# EAGLE board nutzen_06 (EAGLE 9.6.2), part 1 of 3
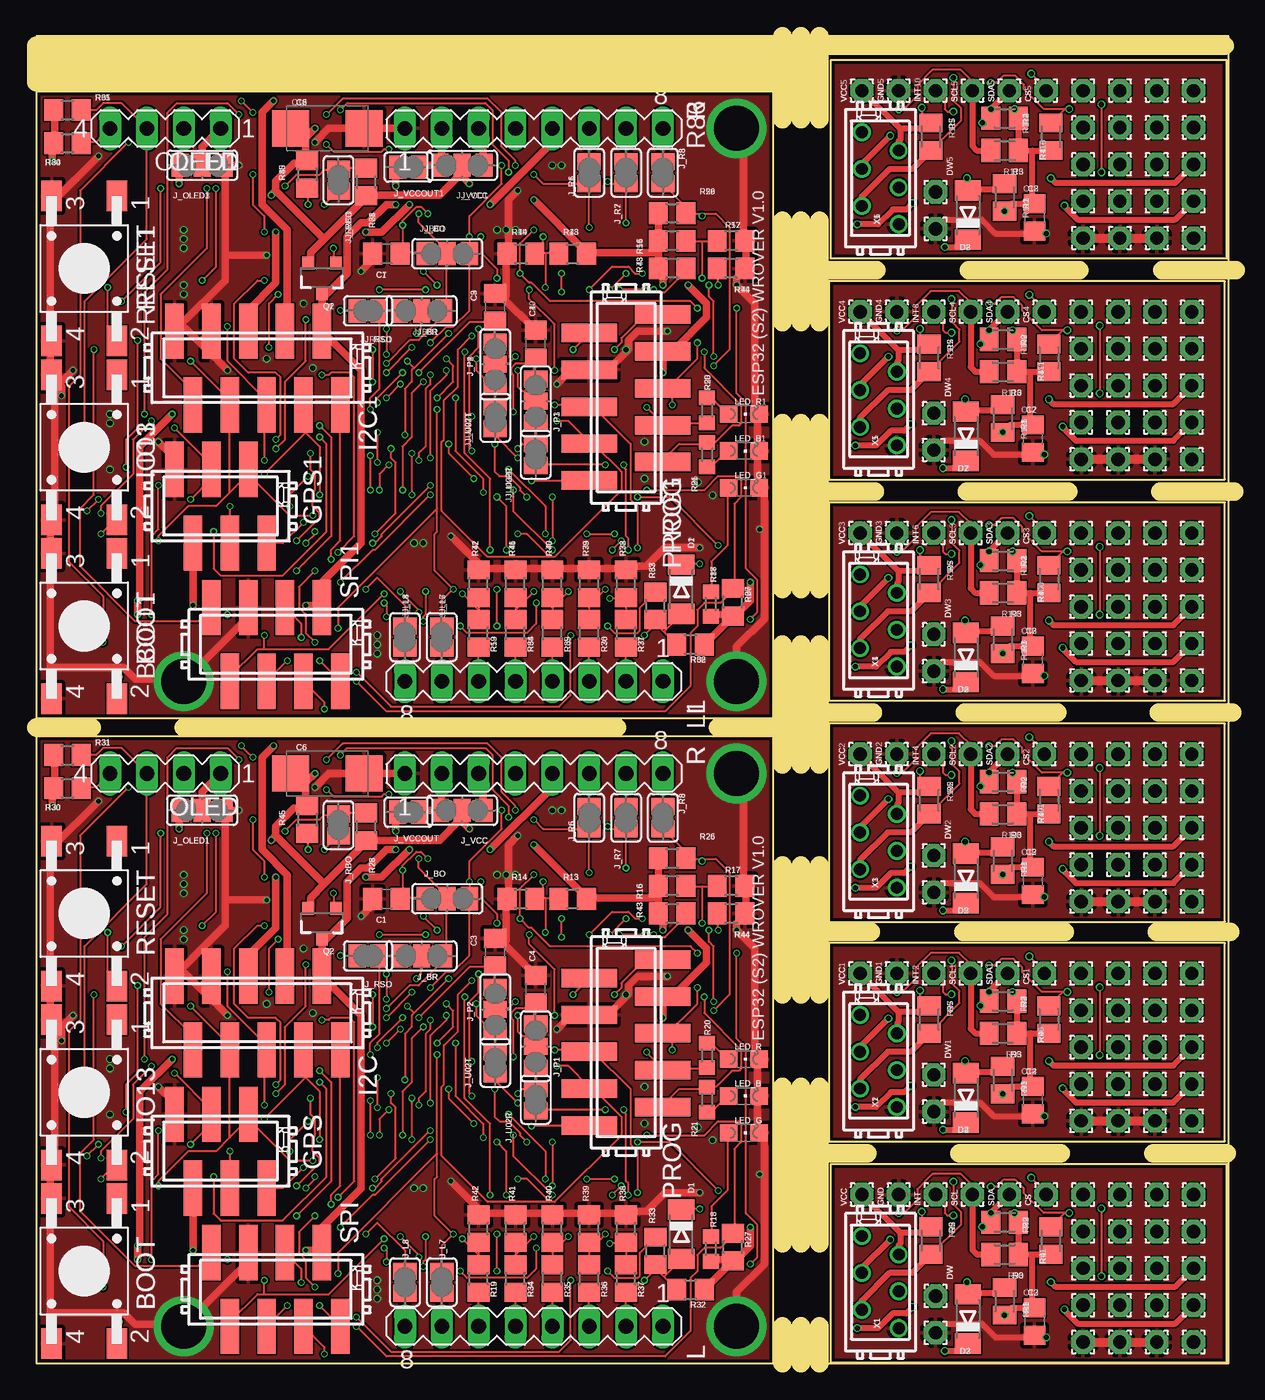
[diagram p0: board, top side]
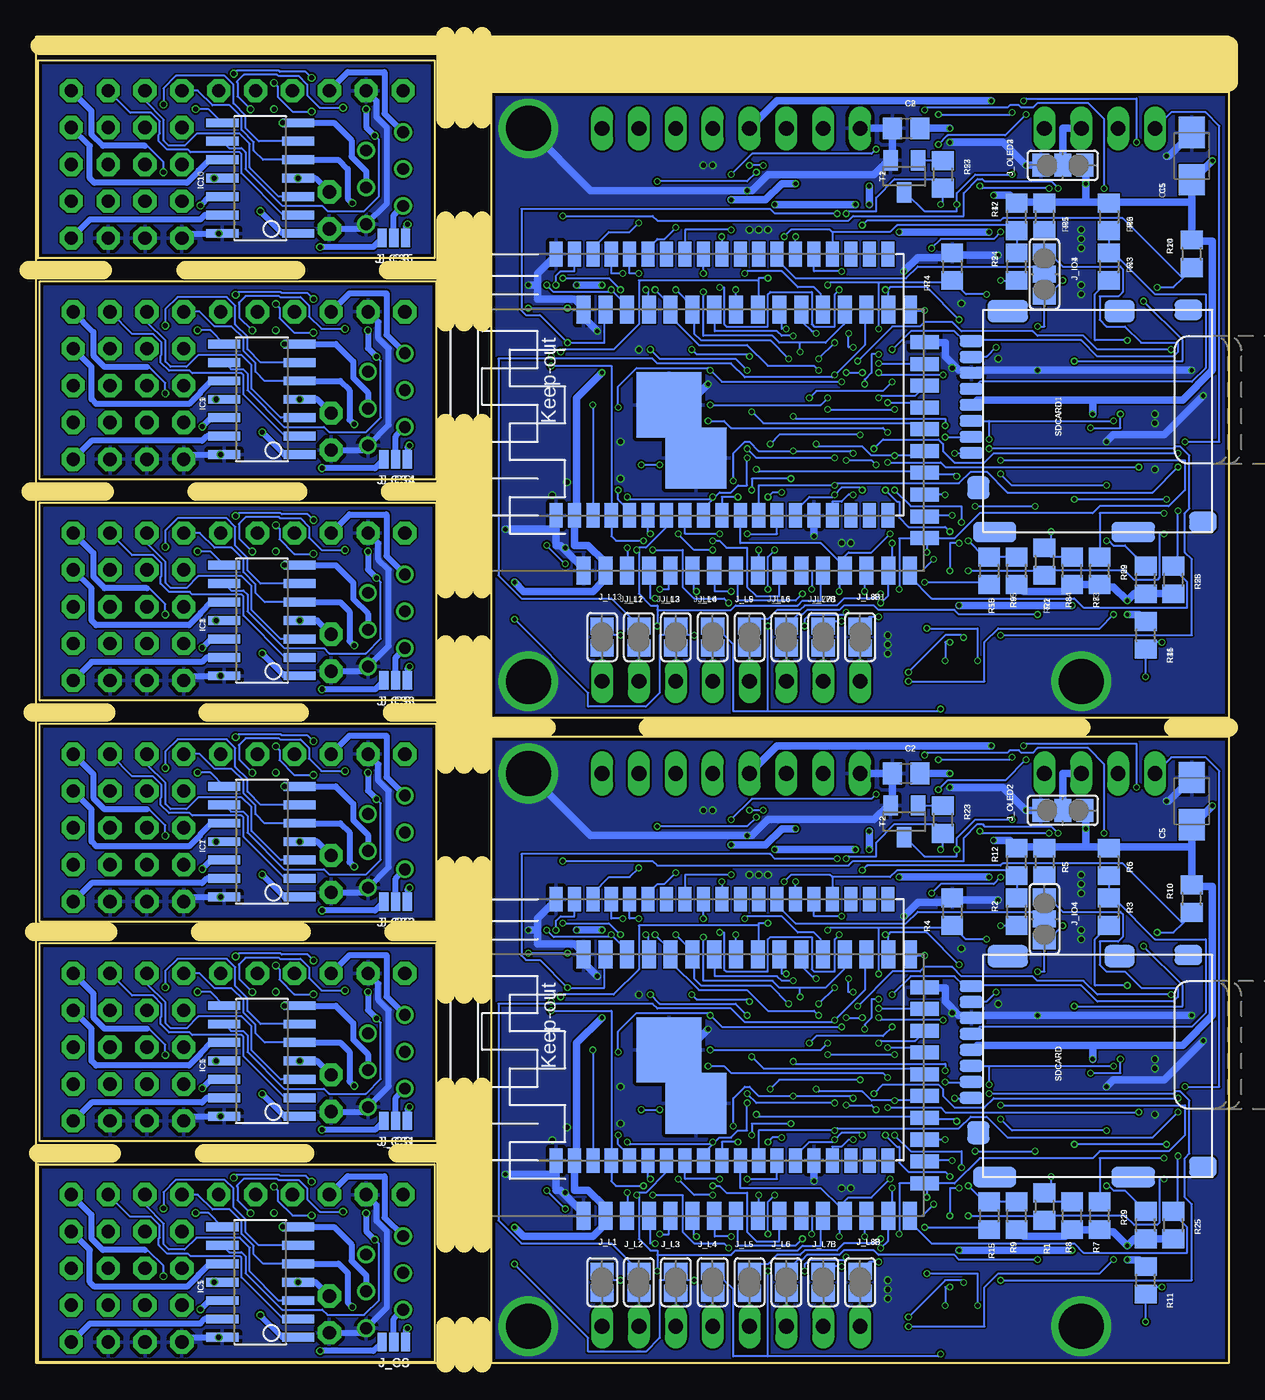
[diagram p1: board, bottom side, seen from below]

Size 82.17 x 91.44 mm. Coordinates in mm from the lower left corner, seen from the top.
Outline: 50.8,0 50.8,43.18 0,43.18
Outline: 0,43.18 0,0 50.8,0
Outline: 50.8,0 82.17,0 82.17,91.44 0,91.44 0,43.18
Outline: 50.8,44.45 50.8,87.63 0,87.63 0,44.45 50.8,44.45
Outline: 82.04,0.06 82.04,13.72 54.74,13.72 54.74,0.06 82.04,0.06
Outline: 81.92,15.3 81.92,28.96 54.61,28.96 54.61,15.3 81.92,15.3
Outline: 81.92,30.42 81.92,44.07 54.61,44.07 54.61,30.42 81.92,30.42
Outline: 81.92,45.66 81.92,59.31 54.61,59.31 54.61,45.66 81.92,45.66
Outline: 81.92,60.9 81.92,74.55 54.61,74.55 54.61,60.9 81.92,60.9
Outline: 82.04,76.14 82.04,89.79 54.74,89.79 54.74,76.14 82.04,76.14
Copper layers (1*16): Top 0.035559375mm / dielectric 1.6mm / Bottom 0.035559375mm
Design rules "jlcpcb2layer": minimum track width 5mil, minimum drill 12mil, track to track 5mil, track to pad 5mil, pad to pad 5mil, via to via 5mil, smd to smd 5mil, copper to edge 8mil, drill to drill 6mil, minimum pad ring 5mil, minimum via ring 3mil, stop-mask expansion 2.5mil, vias tented up to drill 0mil, thermal gap 10mil
Net classes: 1 gnd: width 0.508 mm, drill 0.254 mm; 2 power: width 0.508 mm, drill 0.254 mm
Milling: 46 lines

## Footprints (pad centres in the part's own frame; a part is rotated, then mirrored left to right if it is on the bottom)
TASTER-9314_SMD = smd 2.1 x 1.4: 1 -5,2.25; 2 5,2.25; 3 -5,-2.25; 4 5,-2.25
C0805 = smd 1.3 x 1.5: 1 -0.95,0; 2 0.95,0
B/3528-21W = smd 2.15 x 1.8: + 1.625,0; - -1.625,0
C/6032-28R = smd 2.55 x 2.5: + 2.525,0; - -2.525,0
1,6/0,9 = drill 0.914 pad 1.6 octagon: 1 0,0
MINIMELF = smd 1.4 x 1.8: A 1.7,0; C -1.7,0
MICROMATCH-6SMD = smd 1.27 x 3.81: 1 3.175,-2.54; 2 1.905,2.54; 3 0.635,-2.54; 4 -0.635,2.54; 5 -1.905,-2.54; 6 -3.175,2.54
MICROMATCH-10SMD = smd 1.27 x 3.81: 1 5.715,-2.54; 2 4.445,2.54; 3 3.175,-2.54; 4 1.905,2.54; 5 0.635,-2.54; 6 -0.635,2.54; 7 -1.905,-2.54; 8 -3.175,2.54; 9 -4.445,-2.54; 10 -5.715,2.54
ESP32-S2-WROVER = smd 1.93 x 0.965: 1 0,0; 2 0,-1.5; 3 0,-3; 4 0,-4.5; 5 0,-6; 6 0,-7.5; 7 0,-9; 8 0,-10.5; 9 0,-12; 10 0,-13.5; 11 0,-15; 12 0,-16.5; 13 0,-18; 14 0,-19.5; 15 0,-21; 16 0,-22.5; 27 18,-22.5; 28 18,-21; 29 18,-19.5; 30 18,-18; 31 18,-16.5; 32 18,-15; 33 18,-13.5; 34 18,-12; 35 18,-10.5; 36 18,-9; 37 18,-7.5; 38 18,-6; 39 18,-4.5; 40 18,-3; 41 18,-1.5; 42 18,0 | smd 0.965 x 1.93: 17 2.25,-23.5; 18 3.75,-23.5; 19 5.25,-23.5; 20 6.75,-23.5; 21 8.25,-23.5; 22 9.75,-23.5; 23 11.25,-23.5; 24 12.75,-23.5; 25 14.25,-23.5; 26 15.75,-23.5 | smd 4.2 x 4.2: 43 7.75,-7.75
ESP32-WROVER = smd 1.7 x 0.9: CLK 18,1.27; CMD 0,1.27; EN 0,21.59; GND 0,24.13; GND3 18,24.13; GND_2 0,6.35; IO0 18,7.62; IO2 18,6.35; IO4 18,8.89; IO5 18,12.7; IO12 0,7.62; IO13 0,5.08; IO14 0,8.89; IO15 18,5.08; IO18 18,13.97; IO19 18,15.24; IO21 18,17.78; IO22 18,21.59; IO23 18,22.86; IO25 0,12.7; IO26 0,11.43; IO27 0,10.16; IO32 0,15.24; IO33 0,13.97; IO34 0,17.78; IO35 0,16.51; NC0 18,16.51; NC1 18,10.16; NC2 18,11.43; RXD0 18,19.05; SD0 18,2.54; SD1 18,3.81; SD2 0,3.81; SD3 0,2.54; SENSOR_VN 0,19.05; SENSOR_VP 0,20.32; TXD0 18,20.32; VDD33 0,22.86 | smd 4.5 x 4.5: GND2 7.62,16.34
SOIC14 = smd 0.61 x 2.21: 1 -3.81,-2.603; 2 -2.54,-2.603; 3 -1.27,-2.603; 4 0,-2.603; 5 1.27,-2.603; 6 2.54,-2.603; 7 3.81,-2.603; 8 3.81,2.603; 9 2.54,2.603; 10 1.27,2.603; 11 0,2.603; 12 -1.27,2.603; 13 -2.54,2.603; 14 -3.81,2.603
SJ_2 = smd 1.168 x 1.6: 1 -1.524,0; 2 0,0; 3 1.524,0
SMT-JUMPER_3_1-NC_PASTE_NO-SILK = smd 0.635 x 1.27: 1 -0.813,0; 2 0,0; 3 0.813,0
SJ = smd 1.168 x 1.6: 1 -0.762,0; 2 0.762,0
MA08-1 = drill 1.016 long: 1 -8.89,0; 2 -6.35,0; 3 -3.81,0; 4 -1.27,0; 5 1.27,0; 6 3.81,0; 7 6.35,0; 8 8.89,0
CHIPLED_0805 = smd 1.2 x 1.2: A 0,-1.05; C 0,1.05
MA04-1 = drill 1.016 long: 1 -3.81,0; 2 -1.27,0; 3 1.27,0; 4 3.81,0
SOT23-3 = smd 0.8 x 0.9: 1 -0.95,-1; 2 0.95,-1; 3 0,1.1
R0805 = smd 1.3 x 1.5: 1 -0.95,0; 2 0.95,0
R0603 = smd 1 x 1.1: 1 -0.85,0; 2 0.85,0
M0805 = smd 1.3 x 1.6: 1 -0.95,0; 2 0.95,0
MICRO_SD_CONNECTOR = smd 0.8 x 1.6: 1 -2.03,8.2; 2 -0.93,8.2; 3 0.17,8.2; 4 1.27,8.2; 5 2.37,8.2; 6 3.47,8.2; 7 4.57,8.2; 8 5.67,8.2 | smd 1.55 x 2.8: 9 7.735,5.7 | smd 1.55 x 2.1: 10 7.735,-2 | smd 1.4 x 1.9: 11 7.81,-6.75; 12 -6.79,-7.75 | smd 1.4 x 3: 13 -7.49,-2.95; 14 -7.49,6.6 | smd 1.6 x 1.55: 15 -4.43,7.725
MICROMATCH-8-SMD = smd 1.27 x 3.81: 1 4.445,-2.54; 2 3.175,2.54; 3 1.905,-2.54; 4 0.635,2.54; 5 -0.635,-2.54; 6 -1.905,2.54; 7 -3.175,-2.54; 8 -4.445,2.54
SOT23-BEC = smd 1 x 1.4: B -0.95,-1.1; C 0,1.1; E 0.95,-1.1
MICROMATCH-6 = drill 0.813: 1 3.175,1.27; 2 1.905,-1.27; 3 0.635,1.27; 4 -0.635,-1.27; 5 -1.905,1.27; 6 -3.175,-1.27

## Placement (x,y rotation side)
BOOT  [TASTER-9314_SMD]  3.3,6.35 270 top
BOOT1  [TASTER-9314_SMD]  3.3,50.8 270 top
C1  0.1  [C0805]  24.13,32 180 top
C2  0.1  [C0805]  22.23,40.64 180 bottom
C3  22p  [C0805]  31.62,28.32 90 top
C4  22p  [C0805]  34.42,25.78 90 top
C5  10u  [B/3528-21W]  2.54,38.73 270 bottom
C6  [C/6032-28R]  20.07,40.64 180 top
C7  0.1  [C0805]  24.13,76.45 180 top
C8  0.1  [C0805]  22.23,85.09 180 bottom
C9  22p  [C0805]  31.62,72.77 90 top
C10  22p  [C0805]  34.42,70.23 90 top
C11  10u  [B/3528-21W]  2.54,83.19 270 bottom
C12  [C/6032-28R]  20.07,85.09 180 top
C13  100n  [C0805]  68.8,2.88 270 top
C14  100n  [C0805]  68.67,18.12 270 top
C15  100n  [C0805]  68.67,33.24 270 top
C16  100n  [C0805]  68.67,48.48 270 top
C17  100n  [C0805]  68.67,63.72 270 top
C18  100n  [C0805]  68.8,78.96 270 top
CS  [1,6/0,9]  69.6,11.62 90 top
CS1  [1,6/0,9]  69.47,26.86 90 top
CS2  [1,6/0,9]  69.47,41.97 90 top
CS3  [1,6/0,9]  69.47,57.21 90 top
CS4  [1,6/0,9]  69.47,72.45 90 top
CS5  [1,6/0,9]  69.6,87.69 90 top
D1  4148  [MINIMELF]  44.45,8.89 270 top
D2  4148  [MINIMELF]  44.45,53.34 270 top
D3  [MINIMELF]  64.2,3.05 90 top
D4  [MINIMELF]  64.07,18.29 90 top
D5  [MINIMELF]  64.07,33.4 90 top
D6  [MINIMELF]  64.07,48.64 90 top
D7  [MINIMELF]  64.07,63.88 90 top
D8  [MINIMELF]  64.2,79.12 90 top
DW  [1,6/0,9]  61.98,4.64 90 top
DW1  [1,6/0,9]  61.85,19.88 90 top
DW2  [1,6/0,9]  61.85,34.99 90 top
DW3  [1,6/0,9]  61.85,50.23 90 top
DW4  [1,6/0,9]  61.85,65.47 90 top
DW5  [1,6/0,9]  61.98,80.71 90 top
GND  [1,6/0,9]  59.44,11.62 90 top
GND1  [1,6/0,9]  59.31,26.86 90 top
GND2  [1,6/0,9]  59.31,41.97 90 top
GND3  [1,6/0,9]  59.31,57.21 90 top
GND4  [1,6/0,9]  59.31,72.45 90 top
GND5  [1,6/0,9]  59.44,87.69 90 top
GND_  [1,6/0,9]  61.98,2.1 90 top
GND_1  [1,6/0,9]  61.85,17.34 90 top
GND_2  [1,6/0,9]  61.85,32.45 90 top
GND_3  [1,6/0,9]  61.85,47.69 90 top
GND_4  [1,6/0,9]  61.85,62.93 90 top
GND_5  [1,6/0,9]  61.98,78.17 90 top
GPS  GPS  [MICROMATCH-6SMD]  12.7,14.61 0 top
GPS1  GPS  [MICROMATCH-6SMD]  12.7,59.05 0 top
I2C  I2CBUS  [MICROMATCH-10SMD]  15.24,24.13 0 top
I2C1  I2CBUS  [MICROMATCH-10SMD]  15.24,68.58 0 top
IC1  ESP32-S2_WROVER  [ESP32-S2-WROVER]  44.45,10.16 90 bottom
IC2  ESP32-WROVER  [ESP32-WROVER]  22.23,13.97 90 bottom
IC3  ESP32-S2_WROVER  [ESP32-S2-WROVER]  44.45,54.61 90 bottom
IC4  ESP32-WROVER  [ESP32-WROVER]  22.23,58.42 90 bottom
IC5  TINY84 or TINY841  [SOIC14]  66.74,5.59 90 bottom
IC6  TINY84 or TINY841  [SOIC14]  66.61,20.83 90 bottom
IC7  TINY84 or TINY841  [SOIC14]  66.61,35.94 90 bottom
IC8  TINY84 or TINY841  [SOIC14]  66.61,51.18 90 bottom
IC9  TINY84 or TINY841  [SOIC14]  66.61,66.42 90 bottom
IC10  TINY84 or TINY841  [SOIC14]  66.74,81.66 90 bottom
INT  [1,6/0,9]  61.98,11.62 90 top
INT0  [1,6/0,9]  72.14,11.62 90 top
INT1  [1,6/0,9]  72.01,26.86 90 top
INT2  [1,6/0,9]  61.85,26.86 90 top
INT3  [1,6/0,9]  72.01,41.97 90 top
INT4  [1,6/0,9]  61.85,41.97 90 top
INT5  [1,6/0,9]  72.01,57.21 90 top
INT6  [1,6/0,9]  61.85,57.21 90 top
INT7  [1,6/0,9]  72.01,72.45 90 top
INT8  [1,6/0,9]  61.85,72.45 90 top
INT9  [1,6/0,9]  72.14,87.69 90 top
INT10  [1,6/0,9]  61.98,87.69 90 top
IO1  [TASTER-9314_SMD]  3.3,63.12 270 top
IO13  [TASTER-9314_SMD]  3.3,18.67 270 top
J_BO  [SJ_2]  28.32,32 180 top
J_BO1  [SJ_2]  28.32,76.45 180 top
J_BR  [SJ_2]  26.54,28.07 180 top
J_BR1  [SJ_2]  26.54,72.52 180 top
J_CS  [SMT-JUMPER_3_1-NC_PASTE_NO-SILK]  57.53,1.46 180 bottom
J_CS1  [SMT-JUMPER_3_1-NC_PASTE_NO-SILK]  57.4,16.7 180 bottom
J_CS2  [SMT-JUMPER_3_1-NC_PASTE_NO-SILK]  57.4,31.81 180 bottom
J_CS3  [SMT-JUMPER_3_1-NC_PASTE_NO-SILK]  57.4,47.05 180 bottom
J_CS4  [SMT-JUMPER_3_1-NC_PASTE_NO-SILK]  57.4,62.29 180 bottom
J_CS5  [SMT-JUMPER_3_1-NC_PASTE_NO-SILK]  57.53,77.53 180 bottom
J_IO1  [SJ_2]  12.7,75.06 270 bottom
J_IO4  [SJ_2]  12.7,30.61 270 bottom
J_L1  [SJ]  43.18,5.59 270 bottom
J_L2  [SJ]  40.64,5.59 270 bottom
J_L3  [SJ]  38.1,5.59 270 bottom
J_L4  [SJ]  35.56,5.59 270 bottom
J_L5  [SJ]  33.02,5.59 270 bottom
J_L6  [SJ]  30.48,5.59 270 bottom
J_L7  [SJ]  27.94,5.59 270 top
J_L7B  [SJ]  27.94,5.59 270 bottom
J_L7B1  [SJ]  27.94,50.04 270 bottom
J_L8  [SJ]  25.4,5.59 270 top
J_L8B  [SJ]  25.4,5.59 270 bottom
J_L8B1  [SJ]  25.4,50.04 270 bottom
J_L9  [SJ]  33.02,50.04 270 bottom
J_L10  [SJ]  35.56,50.04 270 bottom
J_L11  [SJ]  40.64,50.04 270 bottom
J_L12  [SJ]  38.1,50.04 270 bottom
J_L13  [SJ]  43.18,50.04 270 bottom
J_L14  [SJ]  25.4,50.04 270 top
J_L15  [SJ]  27.94,50.04 270 top
J_L16  [SJ]  30.48,50.04 270 bottom
J_OLED1  [SJ_2]  11.43,38.1 180 top
J_OLED2  [SJ_2]  11.43,38.1 0 bottom
J_OLED3  [SJ_2]  11.43,82.55 180 top
J_OLED4  [SJ_2]  11.43,82.55 0 bottom
J_P1  [SJ_2]  34.42,21.84 270 top
J_P2  [SJ_2]  31.62,24.38 270 top
J_P3  [SJ_2]  34.42,66.29 270 top
J_P4  [SJ_2]  31.62,68.83 270 top
J_R1  [SJ]  38.1,82.04 270 top
J_R2  [SJ]  40.64,82.04 270 top
J_R3  [SJ]  43.18,82.04 270 top
J_R6  [SJ]  38.1,37.59 270 top
J_R7  [SJ]  40.64,37.59 270 top
J_R8  [SJ]  43.18,37.59 270 top
J_RBO  [SJ]  20.83,37.08 270 top
J_RBO1  [SJ]  20.83,81.53 270 top
J_RSO  [SJ]  22.86,28.07 180 top
J_RSO1  [SJ]  22.86,72.52 180 top
J_U02R  [SJ]  34.42,18.16 270 top
J_U02R1  [SJ]  34.42,62.61 270 top
J_U02T  [SJ]  31.62,20.7 270 top
J_U02T1  [SJ]  31.62,65.15 270 top
J_VCC  [SJ_2]  29.34,38.1 180 top
J_VCC1  [SJ_2]  29.34,82.55 180 top
J_VCCOUT  [SJ]  25.65,37.97 0 top
J_VCCOUT1  [SJ]  25.65,82.42 0 top
L  [MA08-1]  34.29,2.54 180 top
L1  [MA08-1]  34.29,46.99 180 top
LED_B  G  [CHIPLED_0805]  48.77,18.41 270 top
LED_B1  G  [CHIPLED_0805]  48.77,62.87 270 top
LED_G  G  [CHIPLED_0805]  48.77,15.88 270 top
LED_G1  G  [CHIPLED_0805]  48.77,60.33 270 top
LED_R  R  [CHIPLED_0805]  48.77,20.95 270 top
LED_R1  R  [CHIPLED_0805]  48.77,65.41 270 top
OLED  [MA04-1]  8.89,40.64 180 top
OLED1  [MA04-1]  8.89,85.09 180 top
PA0  [1,6/0,9]  79.76,1.46 90 top
PA1  [1,6/0,9]  79.76,4 90 top
PA2  [1,6/0,9]  79.76,6.54 90 top
PA3  [1,6/0,9]  79.76,9.08 90 top
PA4  [1,6/0,9]  79.63,16.7 90 top
PA5  [1,6/0,9]  79.63,19.24 90 top
PA6  [1,6/0,9]  79.63,21.78 90 top
PA7  [1,6/0,9]  79.76,11.62 90 top
PA8  [1,6/0,9]  79.63,24.32 90 top
PA9  [1,6/0,9]  79.63,26.86 90 top
PA10  [1,6/0,9]  79.63,31.81 90 top
PA11  [1,6/0,9]  79.63,34.35 90 top
PA12  [1,6/0,9]  79.63,36.89 90 top
PA13  [1,6/0,9]  79.63,39.43 90 top
PA14  [1,6/0,9]  79.63,41.97 90 top
PA15  [1,6/0,9]  79.63,47.05 90 top
PA16  [1,6/0,9]  79.63,49.59 90 top
PA17  [1,6/0,9]  79.63,52.13 90 top
PA18  [1,6/0,9]  79.63,54.67 90 top
PA19  [1,6/0,9]  79.63,57.21 90 top
PA20  [1,6/0,9]  79.63,62.29 90 top
PA21  [1,6/0,9]  79.63,64.83 90 top
PA22  [1,6/0,9]  79.63,67.37 90 top
PA23  [1,6/0,9]  79.63,69.91 90 top
PA24  [1,6/0,9]  79.63,72.45 90 top
PA25  [1,6/0,9]  79.76,77.53 90 top
PA26  [1,6/0,9]  79.76,80.07 90 top
PA27  [1,6/0,9]  79.76,82.61 90 top
PA28  [1,6/0,9]  79.76,85.15 90 top
PA29  [1,6/0,9]  79.76,87.69 90 top
PAD1  [1,6/0,9]  74.55,24.32 90 top
PAD2  [1,6/0,9]  74.55,21.78 90 top
PAD3  [1,6/0,9]  77.09,21.78 90 top
PAD4  [1,6/0,9]  72.01,21.78 90 top
PAD5  [1,6/0,9]  74.55,19.24 90 top
PAD6  [1,6/0,9]  77.09,19.24 90 top
PAD7  [1,6/0,9]  72.01,24.32 90 top
PAD8  [1,6/0,9]  77.09,24.32 90 top
PAD9  [1,6/0,9]  72.01,19.24 90 top
PAD10  [1,6/0,9]  72.01,16.7 90 top
PAD11  [1,6/0,9]  74.55,16.7 90 top
PAD12  [1,6/0,9]  77.09,16.7 90 top
PAD13  [1,6/0,9]  74.55,39.43 90 top
PAD14  [1,6/0,9]  74.55,36.89 90 top
PAD15  [1,6/0,9]  77.09,36.89 90 top
PAD16  [1,6/0,9]  72.01,36.89 90 top
PAD17  [1,6/0,9]  74.55,34.35 90 top
PAD18  [1,6/0,9]  77.09,34.35 90 top
PAD19  [1,6/0,9]  72.01,39.43 90 top
PAD20  [1,6/0,9]  77.09,39.43 90 top
PAD21  [1,6/0,9]  72.01,34.35 90 top
PAD22  [1,6/0,9]  72.01,31.81 90 top
PAD23  [1,6/0,9]  74.55,31.81 90 top
PAD24  [1,6/0,9]  77.09,31.81 90 top
PAD25  [1,6/0,9]  74.55,54.67 90 top
PAD26  [1,6/0,9]  74.55,52.13 90 top
PAD27  [1,6/0,9]  77.09,52.13 90 top
PAD28  [1,6/0,9]  72.01,52.13 90 top
PAD29  [1,6/0,9]  74.55,49.59 90 top
PAD30  [1,6/0,9]  77.09,49.59 90 top
PAD31  [1,6/0,9]  72.01,54.67 90 top
PAD32  [1,6/0,9]  77.09,54.67 90 top
PAD33  [1,6/0,9]  72.01,49.59 90 top
PAD34  [1,6/0,9]  72.01,47.05 90 top
PAD35  [1,6/0,9]  74.55,47.05 90 top
PAD36  [1,6/0,9]  77.09,47.05 90 top
PAD37  [1,6/0,9]  74.55,69.91 90 top
PAD38  [1,6/0,9]  74.55,67.37 90 top
PAD39  [1,6/0,9]  77.09,67.37 90 top
PAD40  [1,6/0,9]  72.01,67.37 90 top
PAD41  [1,6/0,9]  74.55,64.83 90 top
PAD42  [1,6/0,9]  77.09,64.83 90 top
PAD43  [1,6/0,9]  72.01,69.91 90 top
PAD44  [1,6/0,9]  77.09,69.91 90 top
PAD45  [1,6/0,9]  72.01,64.83 90 top
PAD46  [1,6/0,9]  72.01,62.29 90 top
PAD47  [1,6/0,9]  74.55,62.29 90 top
PAD48  [1,6/0,9]  77.09,62.29 90 top
PAD49  [1,6/0,9]  74.68,85.15 90 top
PAD50  [1,6/0,9]  74.68,82.61 90 top
PAD51  [1,6/0,9]  77.22,82.61 90 top
PAD52  [1,6/0,9]  72.14,82.61 90 top
PAD53  [1,6/0,9]  74.68,80.07 90 top
PAD54  [1,6/0,9]  77.22,80.07 90 top
PAD55  [1,6/0,9]  72.14,85.15 90 top
PAD56  [1,6/0,9]  77.22,85.15 90 top
PAD57  [1,6/0,9]  72.14,80.07 90 top
PAD58  [1,6/0,9]  72.14,77.53 90 top
PAD59  [1,6/0,9]  74.68,77.53 90 top
PAD60  [1,6/0,9]  77.22,77.53 90 top
PAD89  [1,6/0,9]  74.68,9.08 90 top
PAD90  [1,6/0,9]  74.68,6.54 90 top
PAD91  [1,6/0,9]  77.22,6.54 90 top
PAD94  [1,6/0,9]  72.14,6.54 90 top
PAD95  [1,6/0,9]  74.68,4 90 top
PAD96  [1,6/0,9]  77.22,4 90 top
PAD97  [1,6/0,9]  72.14,9.08 90 top
PAD98  [1,6/0,9]  77.22,9.08 90 top
PAD99  [1,6/0,9]  72.14,4 90 top
PAD100  [1,6/0,9]  72.14,1.46 90 top
PAD101  [1,6/0,9]  74.68,1.46 90 top
PAD102  [1,6/0,9]  77.22,1.46 90 top
PB0  [1,6/0,9]  77.22,11.62 90 top
PB1  [1,6/0,9]  74.68,11.62 90 top
PB2  [1,6/0,9]  77.09,26.86 90 top
PB3  [1,6/0,9]  74.55,26.86 90 top
PB4  [1,6/0,9]  77.09,41.97 90 top
PB5  [1,6/0,9]  74.55,41.97 90 top
PB6  [1,6/0,9]  77.09,57.21 90 top
PB7  [1,6/0,9]  74.55,57.21 90 top
PB8  [1,6/0,9]  77.09,72.45 90 top
PB9  [1,6/0,9]  74.55,72.45 90 top
PB10  [1,6/0,9]  77.22,87.69 90 top
PB11  [1,6/0,9]  74.68,87.69 90 top
PROG  I2CBUS  [MICROMATCH-10SMD]  40.64,22.1 90 top
PROG1  I2CBUS  [MICROMATCH-10SMD]  40.64,66.55 90 top
Q1  IRLML2244  [SOT23-3]  19.68,74.8 180 top
Q2  IRLML2244  [SOT23-3]  19.68,30.35 180 top
R  [MA08-1]  34.29,40.64 0 top
R1  [R0805]  12.7,10.79 270 bottom
R2  [R0805]  14.61,31.11 90 bottom
R3  [R0805]  8.26,31.11 270 bottom
R4  [R0805]  19.05,31.11 270 bottom
R5  [R0805]  12.7,34.54 270 bottom
R6  [R0805]  8.26,34.54 270 bottom
R7  [R0805]  8.89,10.16 90 bottom
R8  [R0805]  10.79,10.16 90 bottom
R9  [R0805]  14.61,10.16 90 bottom
R10  10k  [R0805]  2.54,32 90 bottom
R11  10k  [R0805]  5.71,5.71 90 bottom
R12  10k  [R0805]  14.61,34.54 90 bottom
R13  10k  [R0805]  36.96,32 0 top
R14  10k  [R0805]  33.4,32 0 top
R15  [R0805]  16.51,10.16 270 bottom
R16  10k  [R0805]  43.81,32.89 180 top
R17  10k  [R0805]  47.88,32.89 180 top
R18  [R0603]  46.48,7.87 270 top
R19  [R0805]  30.48,5.84 90 top
R20  [R0603]  46.23,21.21 270 top
R21  [R0603]  46.23,18.16 90 top
R22  [R0805]  12.7,55.24 270 bottom
R23  10k  [R0805]  19.68,37.47 90 bottom
R24  10k  [R0805]  2.54,76.45 90 bottom
R25  [R0805]  3.81,9.53 90 bottom
R26  [R0805]  43.81,34.8 0 top
R27  [R0805]  48.01,8 90 top
R28  [R0805]  22.73,36.96 90 top
R29  [R0805]  5.71,9.53 90 bottom
R30  [R0805]  2.16,39.62 0 top
R31  [R0805]  2.16,41.91 0 top
R32  [R0805]  45.09,5.08 0 top
R33  [R0805]  42.67,7.75 90 top
R34  [R0805]  33.02,5.84 90 top
R35  [R0805]  35.56,5.84 90 top
R36  [R0805]  38.1,5.84 90 top
R37  [R0805]  40.64,5.84 90 top
R38  [R0805]  40.64,9.27 90 top
R39  [R0805]  38.1,9.27 90 top
R40  [R0805]  35.56,9.27 90 top
R41  [R0805]  33.02,9.27 90 top
R42  [R0805]  30.48,9.27 90 top
R43  10k  [R0805]  43.81,30.99 180 top
R44  10k  [R0805]  47.88,30.99 180 top
R45  10k  [R0805]  18.67,37.47 270 top
R46  10k  [R0805]  5.71,50.16 90 bottom
R47  10k  [R0805]  14.61,78.99 90 bottom
R48  10k  [R0805]  36.96,76.45 0 top
R49  10k  [R0805]  33.4,76.45 0 top
R50  [R0805]  16.51,54.61 270 bottom
R51  10k  [R0805]  43.81,77.34 180 top
R52  10k  [R0805]  47.88,77.34 180 top
R53  [R0805]  30.48,50.29 90 top
R54  [R0805]  14.61,75.56 90 bottom
R55  [R0603]  46.23,65.66 270 top
R56  [R0603]  46.23,62.61 90 top
R57  10k  [R0805]  19.68,81.92 90 bottom
R58  [R0805]  3.81,53.98 90 bottom
R59  [R0805]  43.81,79.25 0 top
R60  [R0805]  48.01,52.45 90 top
R61  [R0805]  22.73,81.41 90 top
R62  [R0805]  5.71,53.98 90 bottom
R63  [R0805]  8.26,75.56 270 bottom
R64  [R0805]  2.16,84.07 0 top
R65  [R0805]  2.16,86.36 0 top
R66  [R0805]  45.09,49.53 0 top
R67  [R0805]  42.67,52.2 90 top
R68  [R0805]  33.02,50.29 90 top
R69  [R0805]  35.56,50.29 90 top
R70  [R0805]  38.1,50.29 90 top
R71  [R0805]  40.64,50.29 90 top
R72  [R0805]  40.64,53.72 90 top
R73  [R0805]  38.1,53.72 90 top
R74  [R0805]  19.05,75.56 270 bottom
R75  [R0805]  35.56,53.72 90 top
R76  [R0805]  33.02,53.72 90 top
R77  [R0805]  30.48,53.72 90 top
R78  10k  [R0805]  43.81,75.44 180 top
R79  10k  [R0805]  47.88,75.44 180 top
R80  10k  [R0805]  18.67,81.92 270 top
R81  [R0805]  12.7,78.99 270 bottom
R82  [R0805]  8.26,78.99 270 bottom
R83  [R0805]  8.89,54.61 90 bottom
R84  [R0805]  10.79,54.61 90 bottom
R85  [R0805]  14.61,54.61 90 bottom
R86  [MA08-1]  34.29,85.09 0 top
R87  [R0603]  46.48,52.32 270 top
R88  10k  [M0805]  66.73,4.27 90 top
R89  10k  [M0805]  66.74,9.72 180 top
R90  10k  [M0805]  66.74,7.49 180 top
R91  10k  [M0805]  69.91,8.45 90 top
R92  10k  [M0805]  61.66,8.45 270 top
R93  10k  [M0805]  66.6,19.51 90 top
R94  10k  [M0805]  66.61,24.96 180 top
R95  10k  [M0805]  66.61,22.73 180 top
R96  10k  [M0805]  69.79,23.69 90 top
R97  10k  [M0805]  61.53,23.69 270 top
R98  10k  [M0805]  66.6,34.62 90 top
R99  10k  [M0805]  66.61,40.07 180 top
R100  10k  [M0805]  66.61,37.85 180 top
R101  10k  [M0805]  69.79,38.8 90 top
R102  10k  [M0805]  61.53,38.8 270 top
R103  10k  [M0805]  66.6,49.86 90 top
R104  10k  [M0805]  66.61,55.31 180 top
R105  10k  [M0805]  66.61,53.09 180 top
R106  10k  [M0805]  69.79,54.04 90 top
R107  10k  [M0805]  61.53,54.04 270 top
R108  10k  [M0805]  66.6,65.1 90 top
R109  10k  [M0805]  66.61,70.55 180 top
R110  10k  [M0805]  66.61,68.33 180 top
R111  10k  [M0805]  69.79,69.28 90 top
R112  10k  [M0805]  61.53,69.28 270 top
R113  10k  [M0805]  66.73,80.34 90 top
R114  10k  [M0805]  66.74,85.79 180 top
R115  10k  [M0805]  66.74,83.57 180 top
R116  10k  [M0805]  69.91,84.52 90 top
R117  10k  [M0805]  61.66,84.52 270 top
RESET  [TASTER-9314_SMD]  3.3,30.99 270 top
RESET1  [TASTER-9314_SMD]  3.3,75.44 270 top
SCL  [1,6/0,9]  64.52,11.62 90 top
SCL1  [1,6/0,9]  64.39,26.86 90 top
SCL2  [1,6/0,9]  64.39,41.97 90 top
SCL3  [1,6/0,9]  64.39,57.21 90 top
SCL4  [1,6/0,9]  64.39,72.45 90 top
SCL5  [1,6/0,9]  64.52,87.69 90 top
SDA  [1,6/0,9]  67.06,11.62 90 top
SDA1  [1,6/0,9]  66.93,26.86 90 top
SDA2  [1,6/0,9]  66.93,41.97 90 top
SDA3  [1,6/0,9]  66.93,57.21 90 top
SDA4  [1,6/0,9]  66.93,72.45 90 top
SDA5  [1,6/0,9]  67.06,87.69 90 top
SDCARD  MICROSD_SD_MODE  [MICRO_SD_CONNECTOR]  9.53,20.32 90 bottom
SDCARD1  MICROSD_SD_MODE  [MICRO_SD_CONNECTOR]  9.53,64.77 90 bottom
SPI  SPIBUS  [MICROMATCH-8-SMD]  16.51,5.08 0 top
SPI1  SPIBUS  [MICROMATCH-8-SMD]  16.51,49.53 0 top
T1  [SOT23-BEC]  22.35,81.79 180 bottom
T2  [SOT23-BEC]  22.35,37.34 180 bottom
VCC  [1,6/0,9]  56.9,11.62 90 top
VCC1  [1,6/0,9]  56.77,26.86 90 top
VCC2  [1,6/0,9]  56.77,41.97 90 top
VCC3  [1,6/0,9]  56.77,57.21 90 top
VCC4  [1,6/0,9]  56.77,72.45 90 top
VCC5  [1,6/0,9]  56.9,87.69 90 top
X1  BUS  [MICROMATCH-6]  58.17,5.59 90 top
X2  BUS  [MICROMATCH-6]  58.04,20.83 90 top
X3  BUS  [MICROMATCH-6]  58.04,35.94 90 top
X4  BUS  [MICROMATCH-6]  58.04,51.18 90 top
X5  BUS  [MICROMATCH-6]  58.04,66.42 90 top
X6  BUS  [MICROMATCH-6]  58.17,81.66 90 top

## Library data of the parts
BOOT BOOT1 IO1 IO13 RESET RESET1 = Ergaenzung
C1-C12 = rcl; SPICEPREFIX: C
C13-C18 = rcl
CS CS1-CS5 DW DW1-DW5 GND GND1-GND5 GND_ GND_1-GND_5 INT INT0 INT1-INT10 PA0 PA1-PA29 PAD1-PAD60 PAD89-PAD91 PAD94-PAD102 PB0 PB1-PB11 SCL SCL1-SCL5 SDA SDA1-SDA5 VCC VCC1-VCC5 = wirepad
D1-D8 = diode
GPS GPS1 I2C I2C1 PROG PROG1 SPI SPI1 = con-amp-micromatch
IC1-IC4 = ESP32-Wrover
IC5-IC10 = avr-7
J_BO J_BO1 J_BR J_BR1 J_IO1 J_IO4 J_L1-J_L7 J_L7B J_L7B1 J_L8 J_L8B J_L8B1 J_L9-J_L16 J_OLED1-J_OLED4 J_P1-J_P4 J_R1-J_R3 J_R6-J_R8 J_RBO J_RBO1 J_RSO J_RSO1 J_U02R J_U02R1 J_U02T J_U02T1 J_VCC J_VCC1 J_VCCOUT J_VCCOUT1 = jumper
J_CS J_CS1-J_CS5 = SparkFun-Jumpers
L L1 OLED OLED1 R R86 = con-lstb; OC_FARNELL: unknown; OC_NEWARK: unknown
LED_B LED_B1 LED_G LED_G1 LED_R LED_R1 = led
Q1 Q2 = User-Submitted; PROD_ID: TRANS-11153
R1-R85 R87-R117 = rcl; SPICEPREFIX: R
SDCARD SDCARD1 = con-molex-microsd
T1 T2 = transistor
X1-X6 = con-amp-micromatch; MPN: 7-215464-6; OC_FARNELL: 3784630; OC_NEWARK: 19R8125

## Nets
BOOT: BOOT.2 IC1.3 IC2.IO0 J_BO.1 PROG.6 R11.1
BOOT1: BOOT1.2 IC3.3 IC4.IO0 J_BO1.1 PROG1.6 R46.1
BUS_FON: I2C.3 IC1.19 IC2.SENSOR_VN R27.2
BUS_FON1: I2C1.3 IC3.19 IC4.SENSOR_VN R60.2
BUS_INT: I2C.9 IC1.14 IC2.SENSOR_VP J_R8.2 R26.2
BUS_INT1: I2C1.9 IC3.14 IC4.SENSOR_VP J_R3.2 R59.2
BUS_INT2: IC5.8 INT.1 R91.2 X1.1
BUS_INT3: IC6.8 INT2.1 R96.2 X2.1
BUS_INT4: IC7.8 INT4.1 R101.2 X3.1
BUS_INT5: IC8.8 INT6.1 R106.2 X4.1
BUS_INT6: IC9.8 INT8.1 R111.2 X5.1
BUS_INT7: IC10.8 INT10.1 R116.2 X6.1
BUS_ON: IC1.25 J_BO.2 J_BR.1 J_RBO.2 R23.1
BUS_ON1: IC3.25 J_BO1.2 J_BR1.1 J_RBO1.2 R57.1
BUS_P1: CS1.1 J_CS1.2 R97.2 X2.5
BUS_P2: CS2.1 J_CS2.2 R102.2 X3.5
BUS_P3: CS3.1 J_CS3.2 R107.2 X4.5
BUS_P4: CS4.1 J_CS4.2 R112.2 X5.5
BUS_P5: CS.1 J_CS.2 R92.2 X1.5
BUS_P6: CS5.1 J_CS5.2 R117.2 X6.5
BUS_RESET: I2C.5 IC1.17 J_BR.2 J_IO4.3 J_L8.1 J_RBO.1 R28.2
BUS_RESET1: I2C1.5 IC3.17 J_BR1.2 J_IO1.3 J_L14.1 J_RBO1.1 R61.2
BUS_RESET2: D3.C J_CS.3
BUS_RESET3: D4.C J_CS1.3
BUS_RESET4: D5.C J_CS2.3
BUS_RESET5: D6.C J_CS3.3
BUS_RESET6: D7.C J_CS4.3
BUS_RESET7: D8.C J_CS5.3
BUS_SCL: GPS.2 I2C.7 IC1.18 IC2.IO22 J_R7.2 R29.2
BUS_SCL1: GPS1.2 I2C1.7 IC3.18 IC4.IO22 J_R2.2 R62.2
BUS_SCL2: IC5.9 R90.2 SCL.1 X1.3
BUS_SCL3: IC6.9 R95.2 SCL1.1 X2.3
BUS_SCL4: IC7.9 R100.2 SCL2.1 X3.3
BUS_SCL5: IC8.9 R105.2 SCL3.1 X4.3
BUS_SCL6: IC9.9 R110.2 SCL4.1 X5.3
BUS_SCL7: IC10.9 R115.2 SCL5.1 X6.3
BUS_SDA: GPS.4 I2C.1 IC1.16 IC2.IO21 J_R6.2 R25.2
BUS_SDA1: GPS1.4 I2C1.1 IC3.16 IC4.IO21 J_R1.2 R58.2
BUS_SDA2: IC5.7 R89.2 SDA.1 X1.4
BUS_SDA3: IC6.7 R94.2 SDA1.1 X2.4
BUS_SDA4: IC7.7 R99.2 SDA2.1 X3.4
BUS_SDA5: IC8.7 R104.2 SDA3.1 X4.4
BUS_SDA6: IC9.7 R109.2 SDA4.1 X5.4
BUS_SDA7: IC10.7 R114.2 SDA5.1 X6.4
DW: D3.A DW.1 IC5.4 R88.2
DW1: D4.A DW1.1 IC6.4 R93.2
DW2: D5.A DW2.1 IC7.4 R98.2
DW3: D6.A DW3.1 IC8.4 R103.2
DW4: D7.A DW4.1 IC9.4 R108.2
DW5: D8.A DW5.1 IC10.4 R113.2
EN: C1.1 IC1.41 IC2.EN J_BO.3 PROG.5 R10.1 RESET.2
EN1: C7.1 IC3.41 IC4.EN J_BO1.3 PROG1.5 R24.1 RESET1.2
GND [gnd]: BOOT.3 BOOT.4 C1.2 C2.2 C3.2 C4.2 C5.- C6.- GPS.6 I2C.8 I2C.10 IC1.1 IC1.26 IC1.42 IC1.43 IC2.GND IC2.GND2 IC2.GND3 IC2.GND_2 IO13.3 IO13.4 J_OLED1.1 J_OLED2.1 LED_B.C LED_G.C LED_R.C PROG.4 R4.1 R14.1 R17.1 R38.2 R39.2 R40.2 R41.2 R42.2 R44.1 R.1 RESET.3 RESET.4 SDCARD.6 SPI.6 T2.E
GND1 [gnd]: BOOT1.3 BOOT1.4 C7.2 C8.2 C9.2 C10.2 C11.- C12.- GPS1.6 I2C1.8 I2C1.10 IC3.1 IC3.26 IC3.42 IC3.43 IC4.GND IC4.GND2 IC4.GND3 IC4.GND_2 IO1.3 IO1.4 J_OLED3.1 J_OLED4.1 LED_B1.C LED_G1.C LED_R1.C PROG1.4 R49.1 R52.1 R72.2 R73.2 R74.1 R75.2 R76.2 R77.2 R79.1 R86.1 RESET1.3 RESET1.4 SDCARD1.6 SPI1.6 T1.E
GND2: C13.2 GND.1 GND_.1 IC5.14 PAD100.1 PAD101.1 PAD102.1 X1.6
GND3: C14.2 GND1.1 GND_1.1 IC6.14 PAD10.1 PAD11.1 PAD12.1 X2.6
GND4: C15.2 GND2.1 GND_2.1 IC7.14 PAD22.1 PAD23.1 PAD24.1 X3.6
GND5: C16.2 GND3.1 GND_3.1 IC8.14 PAD34.1 PAD35.1 PAD36.1 X4.6
GND6: C17.2 GND4.1 GND_4.1 IC9.14 PAD46.1 PAD47.1 PAD48.1 X5.6
GND7: C18.2 GND5.1 GND_5.1 IC10.14 PAD58.1 PAD59.1 PAD60.1 X6.6
INT0: IC5.5 INT0.1 J_CS.1
INT1: IC6.5 INT1.1 J_CS1.1
INT2: IC7.5 INT3.1 J_CS2.1
INT3: IC8.5 INT5.1 J_CS3.1
INT4: IC9.5 INT7.1 J_CS4.1
INT5: IC10.5 INT9.1 J_CS5.1
LCD_1 [power]: J_OLED1.2 OLED.1
LCD_2 [power]: J_OLED2.2 OLED.2
LCD_3 [power]: J_OLED3.2 OLED1.1
LCD_4 [power]: J_OLED4.2 OLED1.2
MTCK: IC1.33 IC2.IO13 IO13.2 PROG.10 R1.2
MTCK1: IC3.33 IC4.IO13 IO1.2 PROG1.10 R22.2
MTDI: IC1.35 IC2.IO12 PROG.7 R15.2 R20.2
MTDI1: IC3.35 IC4.IO12 PROG1.7 R50.2 R55.2
MTDO: IC1.34 IC2.IO15 PROG.9 R2.2 R12.1 R21.2
MTDO1: IC3.34 IC4.IO15 PROG1.9 R47.1 R54.2 R56.2
MTMS: IC1.36 IC2.IO14 PROG.8 R3.2
MTMS1: IC3.36 IC4.IO14 PROG1.8 R63.2
N$1: IC2.IO4 J_IO4.2
N$2: Q2.1 R45.2 T2.C
N$3: J_R6.1 R.6
N$4: LED_G.A R18.1
N$5: J_R7.1 R.7
N$6: J_P1.2 PROG.1
N$7: LED_R1.A R55.1
N$8: LED_B1.A R56.1
N$9: J_L7B1.2 J_L15.2 L1.7
N$10: J_L16.2 L1.6 R53.1
N$11: J_L9.2 L1.5 R68.1
N$12: J_R8.1 R.8
N$13: J_L10.2 L1.4 R69.1
N$14: J_L11.2 L1.2 R71.1
N$15: J_L12.2 L1.3 R70.1
N$16: J_L13.2 L1.1
N$17: J_L8B1.2 J_L14.2 L1.8
N$18: R23.2 T2.B
N$19: J_P4.2 PROG1.2
N$20: LED_R.A R20.1
N$21: LED_B.A R21.1
N$22: IC4.IO4 J_IO1.2
N$23: Q1.1 R80.2 T1.C
N$24: J_L7.2 J_L7B.2 L.7
N$25: J_L6.2 L.6 R19.1
N$26: R57.2 T1.B
N$27: J_L8.2 J_L8B.2 L.8
N$28: J_L5.2 L.5 R34.1
N$29: J_L4.2 L.4 R35.1
N$30: J_L2.2 L.2 R37.1
N$31: J_L3.2 L.3 R36.1
N$32: J_L1.2 L.1
N$33: J_R1.1 R86.6
N$34: J_P2.2 PROG.2
N$35: J_R2.1 R86.7
N$36: J_R3.1 R86.8
N$37: LED_G1.A R87.1
N$38: J_P3.2 PROG1.1
OLED_SCL: IC1.15 IC2.IO27 J_L8B.1 OLED.3 R31.2
OLED_SCL1: IC3.15 IC4.IO27 J_L8B1.1 OLED1.3 R65.2
OLED_SDA: IC1.13 IC2.IO26 J_L7B.1 OLED.4 R30.2
OLED_SDA1: IC3.13 IC4.IO26 J_L7B1.1 OLED1.4 R64.2
PA0: IC5.13 PA0.1
PA1: IC5.12 PA1.1
PA2: IC5.11 PA2.1
PA3: IC5.10 PA3.1
PA4: IC6.13 PA4.1
PA5: IC6.6 PA9.1
PA6: IC6.10 PA8.1
PA7: IC5.6 PA7.1
PA8: IC6.11 PA6.1
PA9: IC6.12 PA5.1
PA10: IC7.13 PA10.1
PA11: IC7.6 PA14.1
PA12: IC7.10 PA13.1
PA13: IC7.11 PA12.1
PA14: IC7.12 PA11.1
PA15: IC8.13 PA15.1
PA16: IC8.6 PA19.1
PA17: IC8.10 PA18.1
PA18: IC8.11 PA17.1
PA19: IC8.12 PA16.1
PA20: IC9.13 PA20.1
PA21: IC9.6 PA24.1
PA22: IC9.10 PA23.1
PA23: IC9.11 PA22.1
PA24: IC9.12 PA21.1
PA25: IC10.13 PA25.1
PA26: IC10.6 PA29.1
PA27: IC10.10 PA28.1
PA28: IC10.11 PA27.1
PA29: IC10.12 PA26.1
PB0: IC5.2 PB0.1
PB1: IC5.3 PB1.1
PB2: IC6.3 PB3.1
PB3: IC6.2 PB2.1
PB4: IC7.3 PB5.1
PB5: IC7.2 PB4.1
PB6: IC8.3 PB7.1
PB7: IC8.2 PB6.1
PB8: IC9.3 PB9.1
PB9: IC9.2 PB8.1
PB10: IC10.3 PB11.1
PB11: IC10.2 PB10.1
S2_IO1: IC1.4 R37.2 R38.1
S2_IO2: IC1.5 R36.2 R39.1
S2_IO3: IC1.6 R35.2 R40.1
S2_IO4: IC1.7 R34.2 R41.1
S2_IO5: IC1.8 R19.2 R42.1
S2_IO6: IC3.8 R53.2 R77.1
S2_IO7: IC3.7 R68.2 R76.1
S2_IO8: IC3.6 R69.2 R75.1
S2_IO9: IC3.5 R70.2 R73.1
S2_IO10: IC3.4 R71.2 R72.1
S2_IO11: IC3.39 R51.1 R52.2
S2_IO12: IC3.40 R78.1 R79.2
S2_IO45: IC1.39 R16.1 R17.2
S2_IO46: IC1.40 R43.1 R44.2
SD_CLK: R3.1 R6.2 SDCARD.5
SD_CLK1: R63.1 R82.2 SDCARD1.5
SD_CMD: R2.1 R7.2 SDCARD.3
SD_CMD1: R54.1 R83.2 SDCARD1.3
SD_D0: IC1.24 IC2.IO2 R4.2 SDCARD.7
SD_D1: IC1.9 J_IO4.1 R5.2 SDCARD.8
SD_D2: R9.2 R15.1 SDCARD.1
SD_D3: R1.1 R8.2 SDCARD.2
SD_D4: IC3.9 J_IO1.1 R81.2 SDCARD1.8
SD_D5: IC3.24 IC4.IO2 R74.2 SDCARD1.7
SD_D6: R22.1 R84.2 SDCARD1.2
SD_D7: R50.1 R85.2 SDCARD1.1
SPI_CS0: IC1.28 IC2.IO5 J_L5.1 R13.1 R14.2 SPI.7
SPI_CS1: IC1.32 IC2.IO25 J_L6.1 SPI.8
SPI_CS2: IC3.32 IC4.IO25 J_L16.1 SPI1.8
SPI_CS3: IC3.28 IC4.IO5 J_L9.1 R48.1 R49.2 SPI1.7
SPI_MISO: IC1.29 IC2.IO23 J_L2.1 SPI.1
SPI_MISO1: IC3.29 IC4.IO23 J_L11.1 SPI1.1
SPI_MOSI: IC1.31 IC2.IO19 J_L3.1 SPI.4
SPI_MOSI1: IC3.31 IC4.IO19 J_L12.1 SPI1.4
SPI_ON: IC1.27 J_RSO.2
SPI_ON1: IC3.27 J_RSO1.2
SPI_RESET: IC1.11 J_BR.3 J_L7.1 J_RSO.1 SPI.5
SPI_RESET1: IC3.11 J_BR1.3 J_L15.1 J_RSO1.1 SPI1.5
SPI_SCK: IC1.30 IC2.IO18 J_L4.1 SPI.3
SPI_SCK1: IC3.30 IC4.IO18 J_L10.1 SPI1.3
U0RXD: IC1.38 IC2.RXD0 J_P1.3 J_U02R.1
U0RXD1: IC3.38 IC4.RXD0 J_P3.3 J_U02R1.1
U0TXD: IC1.37 IC2.TXD0 J_P2.3 J_U02T.1
U0TXD1: IC3.37 IC4.TXD0 J_P4.3 J_U02T1.1
U1 [power]: I2C1.4 R86.4
U1RXD: GPS.1 IC1.21 IC2.IO34
U1RXD1: GPS1.1 IC3.21 IC4.IO34
U1TXD: GPS.3 IC1.20 IC2.IO32
U1TXD1: GPS1.3 IC3.20 IC4.IO32
U2_BUS: D1.A J_L1.1 R32.1 R33.1
U2_BUS1: D2.A J_L13.1 R66.1 R67.1
U2RXD: IC1.12 IC2.IO35 J_U02R.2 R33.2
U2RXD1: IC3.12 IC4.IO35 J_U02R1.2 R67.2
U2TXD: D1.C IC1.10 IC2.IO33 J_U02T.2
U2TXD1: D2.C IC3.10 IC4.IO33 J_U02T1.2
U5 [power]: I2C.4 R.4
U33A [power]: J_VCC.3 J_VCCOUT.2 R.2
U33A1 [power]: J_VCC1.3 J_VCCOUT1.2 R86.2
U33B [power]: J_VCC.1 R.3
U33B1 [power]: J_VCC1.1 R86.3
UBAT [power]: I2C.6 R.5
UBAT1 [power]: I2C1.6 R86.5
UBUS [power]: GPS.5 I2C.2 J_VCCOUT.1 Q2.3 SPI.2
UBUS1 [power]: GPS1.5 I2C1.2 J_VCCOUT1.1 Q1.3 SPI1.2
USBN: C4.1 IC1.22 J_P1.1
USBN1: C10.1 IC3.22 J_P3.1
USBP: C3.1 IC1.23 J_P2.1
USBP1: C9.1 IC3.23 J_P4.1
VCC [power]: C2.1 C5.+ C6.+ IC1.2 IC2.VDD33 J_OLED1.3 J_OLED2.3 J_VCC.2 PROG.3 Q2.2 R5.1 R6.1 R7.1 R8.1 R9.1 R10.2 R11.2 R12.2 R13.2 R16.2 R18.2 R25.1 R26.1 R27.1 R28.1 R29.1 R30.1 R31.1 R32.2 R43.2 R45.1 SDCARD.4
VCC1 [power]: C8.1 C11.+ C12.+ IC3.2 IC4.VDD33 J_OLED3.3 J_OLED4.3 J_VCC1.2 PROG1.3 Q1.2 R24.2 R46.2 R47.2 R48.2 R51.2 R58.1 R59.1 R60.1 R61.1 R62.1 R64.1 R65.1 R66.2 R78.2 R80.1 R81.1 R82.1 R83.1 R84.1 R85.1 R87.2 SDCARD1.4
VCC2: C13.1 IC5.1 R88.1 R89.1 R90.1 R91.1 R92.1 VCC.1 X1.2
VCC3: C14.1 IC6.1 R93.1 R94.1 R95.1 R96.1 R97.1 VCC1.1 X2.2
VCC4: C15.1 IC7.1 R98.1 R99.1 R100.1 R101.1 R102.1 VCC2.1 X3.2
VCC5: C16.1 IC8.1 R103.1 R104.1 R105.1 R106.1 R107.1 VCC3.1 X4.2
VCC6: C17.1 IC9.1 R108.1 R109.1 R110.1 R111.1 R112.1 VCC4.1 X5.2
VCC7: C18.1 IC10.1 R113.1 R114.1 R115.1 R116.1 R117.1 VCC5.1 X6.2

## Tracks (layer width: path | path; a pad name or v marks a point on that pad's centre or on a via)
BOOT  (via drill 0.3)
  Top 0.127: v5.71,2.86 5.71,1.59 5.56,1.43 BOOT.2 | v27.15,25.88 28.26,26.99 28.73,26.99 29.84,28.1 J_BO.1 v29.84,33.18 29.84,34.61 32.07,36.83 v32.07,38.1 | v28.26,24.77 28.73,24.29 28.73,23.18 v27.62,22.07 | v35.72,21.59 38.1,21.59 PROG.6 38.1,21.43 38.42,21.43 40.96,18.89 40.96,15.08 41.43,14.61 v41.43,11.75 | v4.6,5.24 4.6,8.41 2.22,10.79 2.22,22.86 3.02,23.65 3.02,36.35 v6.35,39.69 | v14.92,41.75 v14.13,42.55 | v20,41.59 21.11,42.7 31.11,42.7 32.07,41.75 32.07,39.37 33.02,38.42 v33.02,38.1
  Bottom 0.127: v5.71,2.86 R11.1 5.71,4.92 5.4,5.24 v4.6,5.24 | IC2.IO0 v29.84,33.18 | v28.26,24.77 v27.15,25.88 | v27.62,22.07 28.1,21.59 v35.72,21.59 | v41.43,11.75 41.43,10.16 IC1.3 | v6.35,39.69 6.35,42.7 13.97,42.7 v14.13,42.55 | v14.92,41.75 15.08,41.59 v20,41.59 | v32.07,38.1 v33.02,38.1
BOOT1  (via drill 0.3)
  Top 0.127: v5.71,47.31 5.71,46.04 5.56,45.88 BOOT1.2 | v27.15,70.33 28.26,71.44 28.73,71.44 29.84,72.55 J_BO1.1 v29.84,77.63 29.84,79.06 32.07,81.28 v32.07,82.55 | v28.26,69.22 28.73,68.74 28.73,67.63 v27.62,66.52 | v35.72,66.04 38.1,66.04 PROG1.6 38.1,65.88 38.42,65.88 40.96,63.34 40.96,59.53 41.43,59.05 v41.43,56.2 | v4.6,49.69 4.6,52.86 2.22,55.24 2.22,67.31 3.02,68.1 3.02,80.8 v6.35,84.14 | v14.92,86.2 v14.13,87 | v20,86.04 21.11,87.15 31.11,87.15 32.07,86.2 32.07,83.82 33.02,82.87 v33.02,82.55
  Bottom 0.127: v5.71,47.31 R46.1 5.71,49.37 5.4,49.69 v4.6,49.69 | IC4.IO0 v29.84,77.63 | v28.26,69.22 v27.15,70.33 | v27.62,66.52 28.1,66.04 v35.72,66.04 | v41.43,56.2 41.43,54.61 IC3.3 | v6.35,84.14 6.35,87.15 13.97,87.15 v14.13,87 | v14.92,86.2 15.08,86.04 v20,86.04 | v32.07,82.55 v33.02,82.55
BUS_FON  (via drill 0.3)
  Top 0.127: v19.53,15.4 19.53,18.73 18.57,19.68 | 18.57,19.68 18.41,19.84 I2C.3 | v42.07,15.72 46.04,15.72 46.99,16.67 48.42,16.67 48.58,16.51 48.58,15.24 48.1,14.76 48.1,9.05 R27.2 48.1,8.89 47.15,7.94 46.04,7.94 45.56,7.46 45.56,6.35 45.09,5.87 45.09,2.22 43.34,0.48 24.13,0.48 v22.07,2.54 | v15.72,16.83 18.57,19.68 | v8.41,16.03 8.41,13.02 7.94,12.54 v7.94,7.14
  Bottom 0.127: v19.53,15.4 20.8,15.4 IC1.19 | v42.07,15.72 42.07,15.08 41.27,14.29 IC2.SENSOR_VN | v15.72,16.83 14.92,16.03 v8.41,16.03 | v7.94,7.14 8.89,6.19 15.88,6.19 16.83,5.24 16.83,2.54 v22.07,2.54
BUS_FON1  (via drill 0.3)
  Top 0.127: v19.53,59.85 19.53,63.18 18.57,64.14 | 18.57,64.14 18.41,64.29 I2C1.3 | v42.07,60.17 46.04,60.17 46.99,61.12 48.42,61.12 48.58,60.96 48.58,59.69 48.1,59.21 48.1,53.5 R60.2 48.1,53.34 47.15,52.39 46.04,52.39 45.56,51.91 45.56,50.8 45.09,50.32 45.09,46.67 43.34,44.93 24.13,44.93 v22.07,46.99 | v15.72,61.28 18.57,64.14 | v8.41,60.48 8.41,57.47 7.94,56.99 v7.94,51.59
  Bottom 0.127: v19.53,59.85 20.8,59.85 IC3.19 | v42.07,60.17 42.07,59.53 41.27,58.74 IC4.SENSOR_VN | v15.72,61.28 14.92,60.48 v8.41,60.48 | v7.94,51.59 8.89,50.64 15.88,50.64 16.83,49.69 16.83,46.99 v22.07,46.99
BUS_INT  (via drill 0.3)
  Top 0.127: J_R8.2 44.61,35.4 44.61,34.92 R26.2 44.77,34.77 45.88,34.77 | v46.67,24.29 47.78,25.4 47.78,33.81 46.83,34.77 45.88,34.77 | v25.08,8.73 26.35,7.46 v26.35,7.3 | v29.21,6.35 29.69,5.87 33.81,5.87 34.45,6.51 v34.45,7.94 | v40.32,12.22 v39.69,11.59 | I2C.9 10.79,22.54 8.57,24.77 8.57,29.21 11.75,32.38 v11.75,36.51 | 45.88,34.77 v45.88,34.61
  Bottom 0.127: v46.67,24.29 42.55,24.29 IC2.SENSOR_VP 42.55,12.54 42.23,12.22 v40.32,12.22 | v25.08,8.73 25.08,10.16 IC1.14 | v26.35,7.3 26.51,7.14 28.89,7.14 29.21,6.83 v29.21,6.35 | v34.45,7.94 34.77,8.26 36.83,8.26 37.62,9.05 37.62,11.59 v39.69,11.59 | v11.75,36.51 12.22,36.99 16.83,36.99 16.99,37.15 17.3,37.15 18.26,36.2 18.26,34.61 25.88,34.61 26.19,34.29 39.37,34.29 39.69,34.61 v45.88,34.61
BUS_INT1  (via drill 0.3)
  Top 0.127: J_R3.2 44.61,79.85 44.61,79.38 R59.2 44.77,79.22 45.88,79.22 | v46.67,68.74 47.78,69.85 47.78,78.26 46.83,79.22 45.88,79.22 | v25.08,53.18 26.35,51.91 v26.35,51.75 | v29.21,50.8 29.69,50.32 33.81,50.32 34.45,50.96 v34.45,52.39 | v40.32,56.67 v39.69,56.04 | I2C1.9 10.79,66.99 8.57,69.22 8.57,73.66 11.75,76.83 v11.75,80.96 | 45.88,79.22 v45.88,79.06
  Bottom 0.127: v46.67,68.74 42.55,68.74 IC4.SENSOR_VP 42.55,56.99 42.23,56.67 v40.32,56.67 | v25.08,53.18 25.08,54.61 IC3.14 | v26.35,51.75 26.51,51.59 28.89,51.59 29.21,51.28 v29.21,50.8 | v34.45,52.39 34.77,52.7 36.83,52.7 37.62,53.5 37.62,56.04 v39.69,56.04 | v11.75,80.96 12.22,81.44 16.83,81.44 16.99,81.6 17.3,81.6 18.26,80.64 18.26,79.06 25.88,79.06 26.19,78.74 39.37,78.74 39.69,79.06 v45.88,79.06
BUS_INT2  (via drill 0.35)
  Top 0.127: v65.79,12.16 66.16,12.16 66.64,12.64 67.48,12.64 68.07,12.04 68.07,11.71 69.43,10.35 v71.18,10.35 70.87,10.35 R91.2 | INT.1 62.61,10.99 62.61,10.35 62.78,10.18 v63.2,10.18
  Bottom 0.127: IC5.8 70.29,10.35 v71.18,10.35 | v65.79,12.16 65.53,11.91 65.53,11.2 64.52,10.18 v63.2,10.18
  Bottom 0.406: INT.1 60.71,12.89 58.17,12.89 58.17,10.03 X1.1
BUS_INT3  (via drill 0.35)
  Top 0.127: v65.66,27.4 66.03,27.4 66.51,27.88 67.35,27.88 67.94,27.28 67.94,26.95 69.3,25.59 v71.06,25.59 70.74,25.59 R96.2 | INT2.1 62.48,26.23 62.48,25.59 62.65,25.42 v63.07,25.42
  Bottom 0.127: IC6.8 70.17,25.59 v71.06,25.59 | v65.66,27.4 65.41,27.15 65.41,26.44 64.39,25.42 v63.07,25.42
  Bottom 0.406: INT2.1 60.58,28.13 58.04,28.13 58.04,25.27 X2.1
BUS_INT4  (via drill 0.35)
  Top 0.127: v65.66,42.51 66.03,42.51 66.51,42.99 67.35,42.99 67.94,42.39 67.94,42.06 69.3,40.7 v71.06,40.7 70.74,40.7 R101.2 | INT4.1 62.48,41.34 62.48,40.7 62.65,40.54 v63.07,40.54
  Bottom 0.127: IC7.8 70.17,40.7 v71.06,40.7 | v65.66,42.51 65.41,42.26 65.41,41.55 64.39,40.54 v63.07,40.54
  Bottom 0.406: INT4.1 60.58,43.24 58.04,43.24 58.04,40.39 X3.1
BUS_INT5  (via drill 0.35)
  Top 0.127: v65.66,57.75 66.03,57.75 66.51,58.23 67.35,58.23 67.94,57.63 67.94,57.3 69.3,55.94 v71.06,55.94 70.74,55.94 R106.2 | INT6.1 62.48,56.58 62.48,55.94 62.65,55.78 v63.07,55.78
  Bottom 0.127: IC8.8 70.17,55.94 v71.06,55.94 | v65.66,57.75 65.41,57.5 65.41,56.79 64.39,55.78 v63.07,55.78
  Bottom 0.406: INT6.1 60.58,58.48 58.04,58.48 58.04,55.63 X4.1
BUS_INT6  (via drill 0.35)
  Top 0.127: v65.66,72.99 66.03,72.99 66.51,73.47 67.35,73.47 67.94,72.87 67.94,72.54 69.3,71.18 v71.06,71.18 70.74,71.18 R111.2 | INT8.1 62.48,71.82 62.48,71.18 62.65,71.02 v63.07,71.02
  Bottom 0.127: IC9.8 70.17,71.18 v71.06,71.18 | v65.66,72.99 65.41,72.74 65.41,72.03 64.39,71.02 v63.07,71.02
  Bottom 0.406: INT8.1 60.58,73.72 58.04,73.72 58.04,70.87 X5.1
BUS_INT7  (via drill 0.35)
  Top 0.127: v65.79,88.23 66.16,88.23 66.64,88.71 67.48,88.71 68.07,88.11 68.07,87.78 69.43,86.42 v71.18,86.42 70.87,86.42 R116.2 | INT10.1 62.61,87.06 62.61,86.42 62.78,86.26 v63.2,86.26
  Bottom 0.127: IC10.8 70.29,86.42 v71.18,86.42 | v65.79,88.23 65.53,87.98 65.53,87.27 64.52,86.26 v63.2,86.26
  Bottom 0.406: INT10.1 60.71,88.96 58.17,88.96 58.17,86.11 X6.1
BUS_ON  (via drill 0.3)
  Top 0.127: v19.84,35.4 20.8,36.35 J_RBO.2 | v24.13,24.45 25.72,26.04 26.35,26.04 27.94,27.62 27.94,27.94 J_BR.1 28.26,28.26 28.26,31.91 J_BO.2 28.42,32.07 26.35,34.13 v26.35,34.77
  Bottom 0.127: v19.84,35.4 19.68,35.4 R23.1 19.68,36.67 20.16,37.15 23.02,37.15 24.29,35.88 24.29,34.92 26.19,34.92 v26.35,34.77 | v24.13,24.45 20.95,24.45 IC1.25
BUS_ON1  (via drill 0.3)
  Top 0.127: v19.84,79.85 20.8,80.8 J_RBO1.2 | v24.13,68.9 25.72,70.48 26.35,70.48 27.94,72.07 27.94,72.39 J_BR1.1 28.26,72.71 28.26,76.36 J_BO1.2 28.42,76.52 26.35,78.58 v26.35,79.22
  Bottom 0.127: v19.84,79.85 19.68,79.85 R57.1 19.68,81.12 20.16,81.6 23.02,81.6 24.29,80.33 24.29,79.38 26.19,79.38 v26.35,79.22 | v24.13,68.9 20.95,68.9 IC3.25
BUS_P1  (via drill 0.35)
  Top 0.127: R97.2 63.61,24.82 63.61,25.65 63.12,26.14 63.12,27.7 v63.07,27.75 | v68.43,28.03 69.47,26.99 CS1.1
  Top 0.406: R97.2 60.26,21.46 58.67,21.46 56.77,19.56 X2.5
  Bottom 0.127: v63.07,27.75 63.48,28.16 65.25,28.16 65.32,28.22 68.24,28.22 v68.43,28.03
  Bottom 0.406: J_CS1.2 57.4,18.29 X2.5
BUS_P2  (via drill 0.35)
  Top 0.127: R102.2 63.61,39.93 63.61,40.76 63.12,41.26 63.12,42.81 v63.07,42.86 | v68.43,43.14 69.47,42.11 CS2.1
  Top 0.406: R102.2 60.26,36.58 58.67,36.58 56.77,34.67 X3.5
  Bottom 0.127: v63.07,42.86 63.48,43.27 65.25,43.27 65.32,43.34 68.24,43.34 v68.43,43.14
  Bottom 0.406: J_CS2.2 57.4,33.4 X3.5
BUS_P3  (via drill 0.35)
  Top 0.127: R107.2 63.61,55.17 63.61,56 63.12,56.5 63.12,58.05 v63.07,58.1 | v68.43,58.38 69.47,57.35 CS3.1
  Top 0.406: R107.2 60.26,51.82 58.67,51.82 56.77,49.91 X4.5
  Bottom 0.127: v63.07,58.1 63.48,58.51 65.25,58.51 65.32,58.58 68.24,58.58 v68.43,58.38
  Bottom 0.406: J_CS3.2 57.4,48.64 X4.5
BUS_P4  (via drill 0.35)
  Top 0.127: R112.2 63.61,70.41 63.61,71.24 63.12,71.74 63.12,73.29 v63.07,73.34 | v68.43,73.62 69.47,72.59 CS4.1
  Top 0.406: R112.2 60.26,67.06 58.67,67.06 56.77,65.15 X5.5
  Bottom 0.127: v63.07,73.34 63.48,73.75 65.25,73.75 65.32,73.82 68.24,73.82 v68.43,73.62
  Bottom 0.406: J_CS4.2 57.4,63.88 X5.5
BUS_P5  (via drill 0.35)
  Top 0.127: R92.2 63.74,9.58 63.74,10.41 63.25,10.9 63.25,12.46 v63.2,12.51 | v68.56,12.79 69.6,11.75 CS.1
  Top 0.406: R92.2 60.39,6.22 58.8,6.22 56.9,4.32 X1.5
  Bottom 0.127: v63.2,12.51 63.61,12.92 65.38,12.92 65.44,12.98 68.37,12.98 v68.56,12.79
  Bottom 0.406: J_CS.2 57.53,3.05 X1.5
BUS_P6  (via drill 0.35)
  Top 0.127: R117.2 63.74,85.65 63.74,86.48 63.25,86.98 63.25,88.53 v63.2,88.58 | v68.56,88.86 69.6,87.83 CS5.1
  Top 0.406: R117.2 60.39,82.3 58.8,82.3 56.9,80.39 X6.5
  Bottom 0.127: v63.2,88.58 63.61,88.99 65.38,88.99 65.44,89.06 68.37,89.06 v68.56,88.86
  Bottom 0.406: J_CS5.2 57.53,79.12 X6.5
BUS_RESET  (via drill 0.3)
  Top 0.127: J_L8.1 25.4,7.78 23.5,9.68 v22.7,8.89 | v26.19,26.51 26.51,26.83 26.51,27.94 J_BR.2 | v24.13,23.81 v25.88,25.56 | v19.68,23.65 20.16,23.65 20.32,23.81 21.59,23.81 21.91,23.5 21.91,12.54 v20.8,11.43 | R28.2 22.7,37.94 20.95,37.94 J_RBO.1 20.8,37.78 19.84,37.78 19.53,37.47 17.94,37.47 v17.14,36.67 | v13.18,26.99 13.18,24.61 15.72,22.07 | 15.72,22.07 15.88,21.91 I2C.5 15.72,22.07 | v12.38,36.51 12.38,31.11 v11.43,30.16 | 15.72,22.07 v15.72,17.78
  Bottom 0.127: v22.7,8.89 22.7,12.38 20.95,12.38 IC1.17 20.8,12.38 | v26.19,26.51 26.19,25.56 v25.88,25.56 | v24.13,23.81 23.97,23.65 v19.68,23.65 | 20.8,12.38 v20.8,11.43 | v13.18,26.99 12.7,26.99 J_IO4.3 12.7,29.21 12.38,29.21 v11.43,30.16 | v17.14,36.67 16.99,36.51 v12.38,36.51 | 20.8,12.38 18.89,12.38 17.14,14.13 9.37,14.13 8.89,14.61 4.13,14.61 3.02,15.72 3.02,17.78 v15.72,17.78
BUS_RESET1  (via drill 0.3)
  Top 0.127: J_L14.1 25.4,52.23 23.5,54.13 v22.7,53.34 | v26.19,70.96 26.51,71.28 26.51,72.39 J_BR1.2 | v24.13,68.26 v25.88,70.01 | v19.68,68.1 20.16,68.1 20.32,68.26 21.59,68.26 21.91,67.94 21.91,56.99 v20.8,55.88 | R61.2 22.7,82.39 20.95,82.39 J_RBO1.1 20.8,82.23 19.84,82.23 19.53,81.92 17.94,81.92 v17.14,81.12 | v13.18,71.44 13.18,69.06 15.72,66.52 | 15.72,66.52 15.88,66.36 I2C1.5 15.72,66.52 | v12.38,80.96 12.38,75.56 v11.43,74.61 | 15.72,66.52 v15.72,62.23
  Bottom 0.127: v22.7,53.34 22.7,56.83 20.95,56.83 IC3.17 20.8,56.83 | v26.19,70.96 26.19,70.01 v25.88,70.01 | v24.13,68.26 23.97,68.1 v19.68,68.1 | 20.8,56.83 v20.8,55.88 | v13.18,71.44 12.7,71.44 J_IO1.3 12.7,73.66 12.38,73.66 v11.43,74.61 | v17.14,81.12 16.99,80.96 v12.38,80.96 | 20.8,56.83 18.89,56.83 17.14,58.58 9.37,58.58 8.89,59.05 4.13,59.05 3.02,60.17 3.02,62.23 v15.72,62.23
BUS_RESET2  (via drill 0.35)
  Top 0.406: v62.61,0.85 63.7,0.85 D3.C
  Bottom 0.406: J_CS.3 58.96,0.85 v62.61,0.85
BUS_RESET3  (via drill 0.35)
  Top 0.406: v62.48,16.09 63.57,16.09 D4.C
  Bottom 0.406: J_CS1.3 58.83,16.09 v62.48,16.09
BUS_RESET4  (via drill 0.35)
  Top 0.406: v62.48,31.2 63.57,31.2 D5.C
  Bottom 0.406: J_CS2.3 58.83,31.2 v62.48,31.2
BUS_RESET5  (via drill 0.35)
  Top 0.406: v62.48,46.44 63.57,46.44 D6.C
  Bottom 0.406: J_CS3.3 58.83,46.44 v62.48,46.44
BUS_RESET6  (via drill 0.35)
  Top 0.406: v62.48,61.68 63.57,61.68 D7.C
  Bottom 0.406: J_CS4.3 58.83,61.68 v62.48,61.68
BUS_RESET7  (via drill 0.35)
  Top 0.406: v62.61,76.92 63.7,76.92 D8.C
  Bottom 0.406: J_CS5.3 58.96,76.92 v62.61,76.92
BUS_SCL  (via drill 0.3)
  Top 0.127: v40.64,34.13 J_R7.2 39.53,36.83 v39.37,36.99 | v8.41,12.22 8.41,12.54 10.48,14.61 12.38,14.61 13.34,15.56 | 14.61,16.83 13.34,15.56 | v19.05,13.97 17.46,13.97 14.61,16.83 | 14.61,16.83 GPS.2 | 13.34,15.56 I2C.7 13.34,21.91 v10.64,24.61 | v32.54,37.62 32.54,38.42 31.43,39.53 31.43,41.91 30.96,42.39 21.43,42.39 v20.95,41.91 | v8.57,36.51 8.57,31.43 v5.87,28.73
  Bottom 0.127: v40.64,34.13 41.27,33.5 42.7,33.5 43.81,32.38 IC2.IO22 | v8.41,12.22 8.26,12.22 7.94,11.91 7.14,11.91 R29.2 | v19.05,13.97 20.8,13.97 IC1.18 | v39.37,36.99 33.18,36.99 v32.54,37.62 | v20.95,41.91 20.8,42.07 15.24,42.07 15.08,42.23 14.45,42.23 14.29,42.07 13.49,42.07 13.18,42.39 9.68,42.39 8.57,41.27 v8.57,36.51 | v5.87,28.73 3.17,26.04 3.17,24.61 v10.64,24.61
BUS_SCL1  (via drill 0.3)
  Top 0.127: v40.64,78.58 J_R2.2 39.53,81.28 v39.37,81.44 | v8.41,56.67 8.41,56.99 10.48,59.05 12.38,59.05 13.34,60.01 | 14.61,61.28 13.34,60.01 | v19.05,58.42 17.46,58.42 14.61,61.28 | 14.61,61.28 GPS1.2 | 13.34,60.01 I2C1.7 13.34,66.36 v10.64,69.06 | v32.54,82.07 32.54,82.87 31.43,83.98 31.43,86.36 30.96,86.84 21.43,86.84 v20.95,86.36 | v8.57,80.96 8.57,75.88 v5.87,73.18
  Bottom 0.127: v40.64,78.58 41.27,77.95 42.7,77.95 43.81,76.83 IC4.IO22 | v8.41,56.67 8.26,56.67 7.94,56.36 7.14,56.36 R62.2 | v19.05,58.42 20.8,58.42 IC3.18 | v39.37,81.44 33.18,81.44 v32.54,82.07 | v20.95,86.36 20.8,86.52 15.24,86.52 15.08,86.68 14.45,86.68 14.29,86.52 13.49,86.52 13.18,86.84 9.68,86.84 8.57,85.72 v8.57,80.96 | v5.87,73.18 3.17,70.48 3.17,69.06 v10.64,69.06
BUS_SCL2  (via drill 0.35)
  Top 0.127: 64.52,12.26 63.72,13.05 61.77,13.05 60.71,11.98 60.71,11.26 59.91,10.46 59.56,10.46
  Top 0.406: 64.52,12.26 SCL.1 64.52,7.81 64.83,7.49 R90.2 | 59.56,10.46 v59.44,10.34 | v58.85,8.52 56.9,6.57 X1.3
  Bottom 0.127: IC5.9 68.87,7.66 68.03,7.66 67.74,7.37 67.74,6.21 65.22,3.68 62.46,3.68 62.1,3.33 59.58,3.33 58.56,4.34 58.56,8.23 v58.85,8.52
  Bottom 0.406: v59.44,10.34 59.44,9.11 v58.85,8.52
BUS_SCL3  (via drill 0.35)
  Top 0.127: 64.39,27.5 63.59,28.29 61.64,28.29 60.58,27.23 60.58,26.5 59.79,25.7 59.43,25.7
  Top 0.406: 64.39,27.5 SCL1.1 64.39,23.05 64.71,22.73 R95.2 | 59.43,25.7 v59.31,25.58 | v58.72,23.76 56.77,21.8 X2.3
  Bottom 0.127: IC6.9 68.75,22.9 67.91,22.9 67.61,22.61 67.61,21.45 65.09,18.92 62.33,18.92 61.98,18.57 59.45,18.57 58.43,19.58 58.43,23.47 v58.72,23.76
  Bottom 0.406: v59.31,25.58 59.31,24.34 v58.72,23.76
BUS_SCL4  (via drill 0.35)
  Top 0.127: 64.39,42.61 63.59,43.4 61.64,43.4 60.58,42.34 60.58,41.61 59.79,40.82 59.43,40.82
  Top 0.406: 64.39,42.61 SCL2.1 64.39,38.16 64.71,37.85 R100.2 | 59.43,40.82 v59.31,40.69 | v58.72,38.87 56.77,36.92 X3.3
  Bottom 0.127: IC7.9 68.75,38.01 67.91,38.01 67.61,37.72 67.61,36.56 65.09,34.04 62.33,34.04 61.98,33.68 59.45,33.68 58.43,34.7 58.43,38.58 v58.72,38.87
  Bottom 0.406: v59.31,40.69 59.31,39.46 v58.72,38.87
BUS_SCL5  (via drill 0.35)
  Top 0.127: 64.39,57.85 63.59,58.64 61.64,58.64 60.58,57.58 60.58,56.85 59.79,56.06 59.43,56.06
  Top 0.406: 64.39,57.85 SCL3.1 64.39,53.4 64.71,53.09 R105.2 | 59.43,56.06 v59.31,55.93 | v58.72,54.11 56.77,52.16 X4.3
  Bottom 0.127: IC8.9 68.75,53.25 67.91,53.25 67.61,52.96 67.61,51.8 65.09,49.28 62.33,49.28 61.98,48.92 59.45,48.92 58.43,49.94 58.43,53.82 v58.72,54.11
  Bottom 0.406: v59.31,55.93 59.31,54.7 v58.72,54.11
BUS_SCL6  (via drill 0.35)
  Top 0.127: 64.39,73.09 63.59,73.88 61.64,73.88 60.58,72.82 60.58,72.09 59.79,71.3 59.43,71.3
  Top 0.406: 64.39,73.09 SCL4.1 64.39,68.64 64.71,68.33 R110.2 | 59.43,71.3 v59.31,71.17 | v58.72,69.35 56.77,67.4 X5.3
  Bottom 0.127: IC9.9 68.75,68.49 67.91,68.49 67.61,68.2 67.61,67.04 65.09,64.52 62.33,64.52 61.98,64.16 59.45,64.16 58.43,65.18 58.43,69.06 v58.72,69.35
  Bottom 0.406: v59.31,71.17 59.31,69.94 v58.72,69.35
BUS_SCL7  (via drill 0.35)
  Top 0.127: 64.52,88.33 63.72,89.12 61.77,89.12 60.71,88.06 60.71,87.33 59.91,86.54 59.56,86.54
  Top 0.406: 64.52,88.33 SCL5.1 64.52,83.88 64.83,83.57 R115.2 | 59.56,86.54 v59.44,86.41 | v58.85,84.59 56.9,82.64 X6.3
  Bottom 0.127: IC10.9 68.87,83.73 68.03,83.73 67.74,83.44 67.74,82.28 65.22,79.76 62.46,79.76 62.1,79.4 59.58,79.4 58.56,80.42 58.56,84.3 v58.85,84.59
  Bottom 0.406: v59.44,86.41 59.44,85.18 v58.85,84.59
BUS_SDA  (via drill 0.3)
  Top 0.127: v38.1,33.81 J_R6.2 34.92,36.83 v34.29,37.47 | I2C.1 20.95,12.22 20.32,11.59 v20.32,10.95 | v10.64,15.08 12.06,16.51 GPS.4 12.06,17.46 v9.53,20 | v3.49,14.29 v4.29,15.08 | v24.29,39.21 23.97,39.21 23.81,39.05 20.48,39.05 v20,39.53 | v13.97,41.59 13.18,42.39 9.68,42.39 9.05,41.75 9.05,30.96 7.46,29.37 v7.46,20.95
  Bottom 0.127: v38.1,33.81 38.89,33.02 39.37,33.02 40.01,32.38 IC2.IO21 | 21.91,10.16 21.91,9.68 20.48,8.26 10.64,8.26 10,7.62 2.86,7.62 2.86,9.37 3.81,10.32 R25.2 3.49,10.48 v3.49,14.29 | v20.32,10.95 21.11,10.16 21.91,10.16 | 21.91,10.16 IC1.16 | v4.29,15.08 v10.64,15.08 | v34.29,37.47 32.86,38.89 24.61,38.89 v24.29,39.21 | v20,39.53 19.37,40.16 15.4,40.16 v13.97,41.59 | v7.46,20.95 7.46,20 v9.53,20
BUS_SDA1  (via drill 0.3)
  Top 0.127: v38.1,78.26 J_R1.2 34.92,81.28 v34.29,81.92 | I2C1.1 20.95,56.67 20.32,56.04 v20.32,55.4 | v10.64,59.53 12.06,60.96 GPS1.4 12.06,61.91 v9.53,64.45 | v3.49,58.74 v4.29,59.53 | v24.29,83.66 23.97,83.66 23.81,83.5 20.48,83.5 v20,83.98 | v13.97,86.04 13.18,86.84 9.68,86.84 9.05,86.2 9.05,75.41 7.46,73.82 v7.46,65.41
  Bottom 0.127: v38.1,78.26 38.89,77.47 39.37,77.47 40.01,76.83 IC4.IO21 | 21.91,54.61 21.91,54.13 20.48,52.7 10.64,52.7 10,52.07 2.86,52.07 2.86,53.82 3.81,54.77 R58.2 3.49,54.93 v3.49,58.74 | v20.32,55.4 21.11,54.61 21.91,54.61 | 21.91,54.61 IC3.16 | v4.29,59.53 v10.64,59.53 | v34.29,81.92 32.86,83.34 24.61,83.34 v24.29,83.66 | v20,83.98 19.37,84.61 15.4,84.61 v13.97,86.04 | v7.46,65.41 7.46,64.45 v9.53,64.45
BUS_SDA2  (via drill 0.35)
  Top 0.127: v65.79,10.35 R89.2 65.47,9.4 v65.2,9.4
  Top 0.406: v65.79,10.35 SDA.1
  Bottom 0.127: IC5.7 v65.2,9.4
  Bottom 0.406: IC5.7 61.66,9.4 60.45,8.19 60.45,7.07 59.44,6.06 X1.4
BUS_SDA3  (via drill 0.35)
  Top 0.127: v65.66,25.59 R94.2 65.34,24.64 v65.07,24.64
  Top 0.406: v65.66,25.59 SDA1.1
  Bottom 0.127: IC6.7 v65.07,24.64
  Bottom 0.406: IC6.7 61.53,24.64 60.33,23.43 60.33,22.31 59.31,21.3 X2.4
BUS_SDA4  (via drill 0.35)
  Top 0.127: v65.66,40.7 R99.2 65.34,39.75 v65.07,39.75
  Top 0.406: v65.66,40.7 v65.66,40.71 SDA2.1
  Bottom 0.127: IC7.7 v65.07,39.75
  Bottom 0.406: IC7.7 61.53,39.75 60.33,38.54 60.33,37.42 59.31,36.41 X3.4
BUS_SDA5  (via drill 0.35)
  Top 0.127: v65.66,55.94 R104.2 65.34,54.99 v65.07,54.99
  Top 0.406: v65.66,55.94 v65.66,55.95 SDA3.1
  Bottom 0.127: IC8.7 v65.07,54.99
  Bottom 0.406: IC8.7 61.53,54.99 60.33,53.78 60.33,52.66 59.31,51.65 X4.4
BUS_SDA6  (via drill 0.35)
  Top 0.127: v65.66,71.18 R109.2 65.34,70.23 v65.07,70.23
  Top 0.406: v65.66,71.18 v65.66,71.19 SDA4.1
  Bottom 0.127: IC9.7 v65.07,70.23
  Bottom 0.406: IC9.7 61.53,70.23 60.33,69.03 60.33,67.91 59.31,66.89 X5.4
BUS_SDA7  (via drill 0.35)
  Top 0.127: v65.79,86.42 R114.2 65.47,85.47 v65.2,85.47
  Top 0.406: v65.79,86.42 v65.79,86.43 SDA5.1
  Bottom 0.127: IC10.7 v65.2,85.47
  Bottom 0.406: IC10.7 61.66,85.47 60.45,84.26 60.45,83.14 59.44,82.13 X6.4
DW  (via drill 0.35)
  Top 0.406: D3.A 64.14,4.81 | 64.14,4.81 IC5.4 | R88.2 66.32,4.81 64.14,4.81
  Bottom 0.406: DW.1 62.93,5.59 IC5.4
  other vias: 64.14,5.59
DW1  (via drill 0.35)
  Top 0.406: D4.A 64.01,20.05 | 64.01,20.05 IC6.4 | R93.2 66.19,20.05 64.01,20.05
  Bottom 0.406: DW1.1 62.8,20.83 IC6.4
  other vias: 64.01,20.83
DW2  (via drill 0.35)
  Top 0.406: D5.A 64.01,35.16 | 64.01,35.16 IC7.4 | R98.2 66.19,35.16 64.01,35.16
  Bottom 0.406: DW2.1 62.8,35.94 IC7.4
  other vias: 64.01,35.94
DW3  (via drill 0.35)
  Top 0.406: D6.A 64.01,50.4 | 64.01,50.4 IC8.4 | R103.2 66.19,50.4 64.01,50.4
  Bottom 0.406: DW3.1 62.8,51.18 IC8.4
  other vias: 64.01,51.18
DW4  (via drill 0.35)